# Altium PCB IsolatorBoard.PcbDoc
Units mm, origin at the board's own origin, x right, y up, seen from the top; angles counter-clockwise.
Board outline 164.08 x 101.09 mm, 2 copper layers (Top Layer, Bottom Layer); 17 components, 72 nets, 214 pads, 14 vias.
Unrouted connection lines stored in the file: 1.
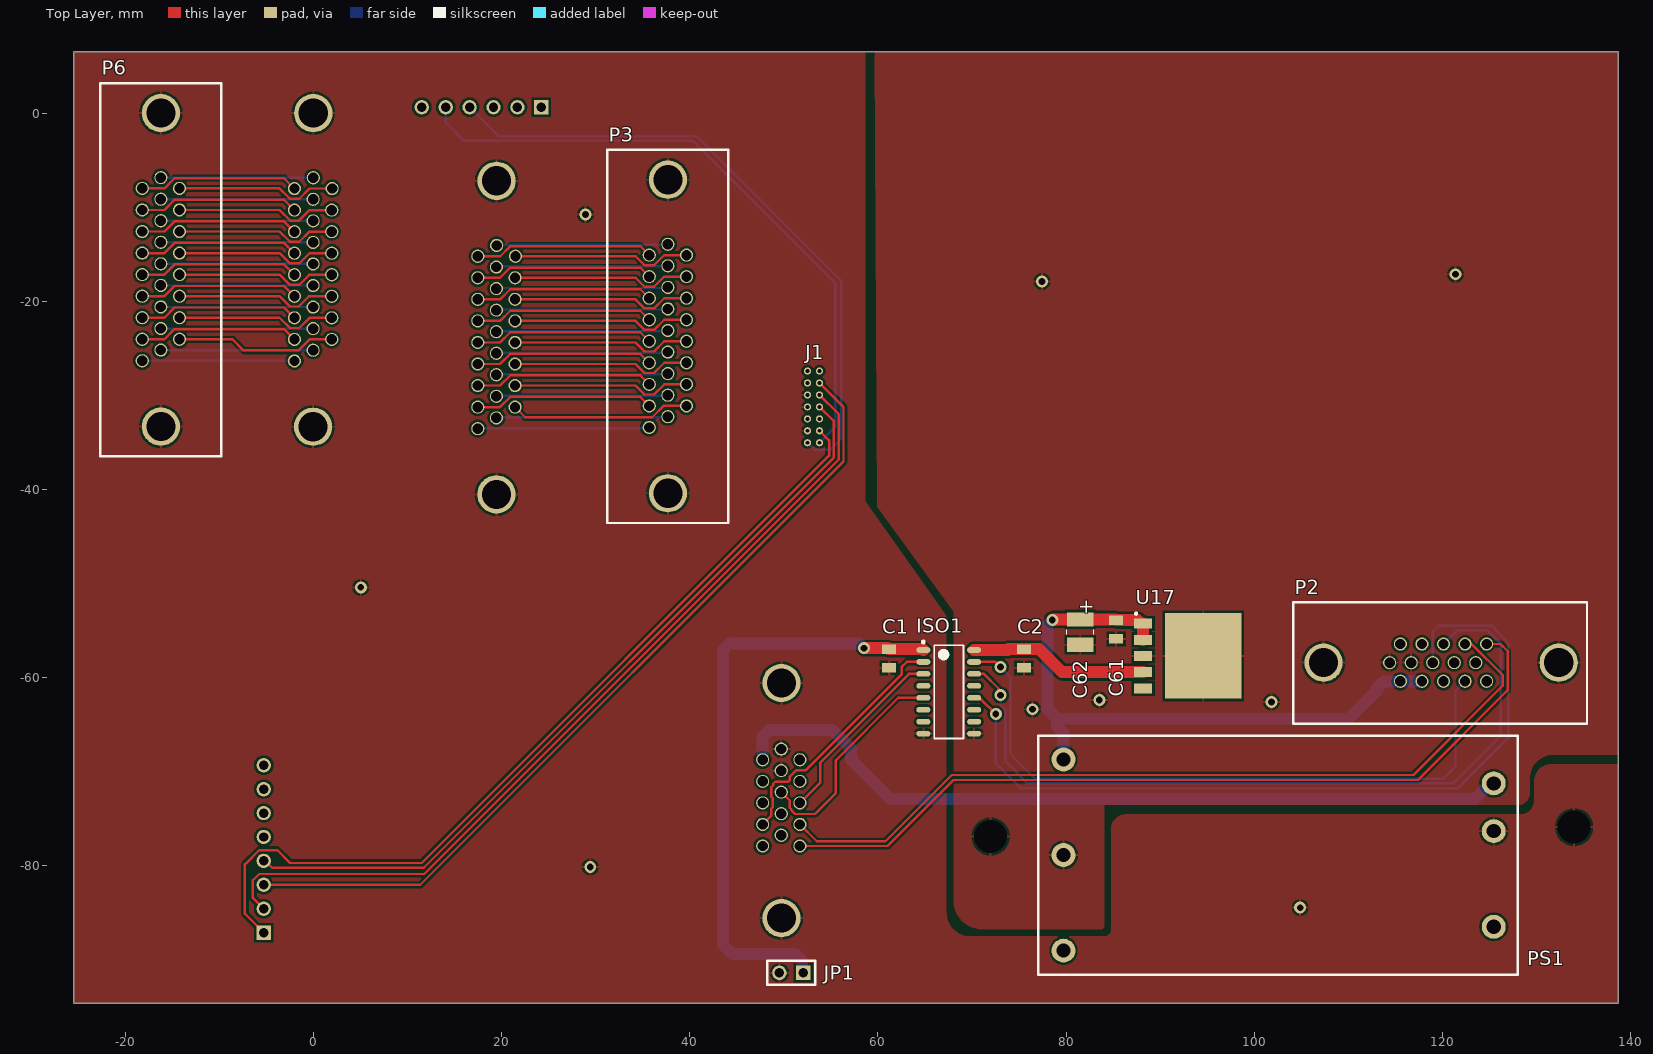
[diagram p0: Top Layer view]
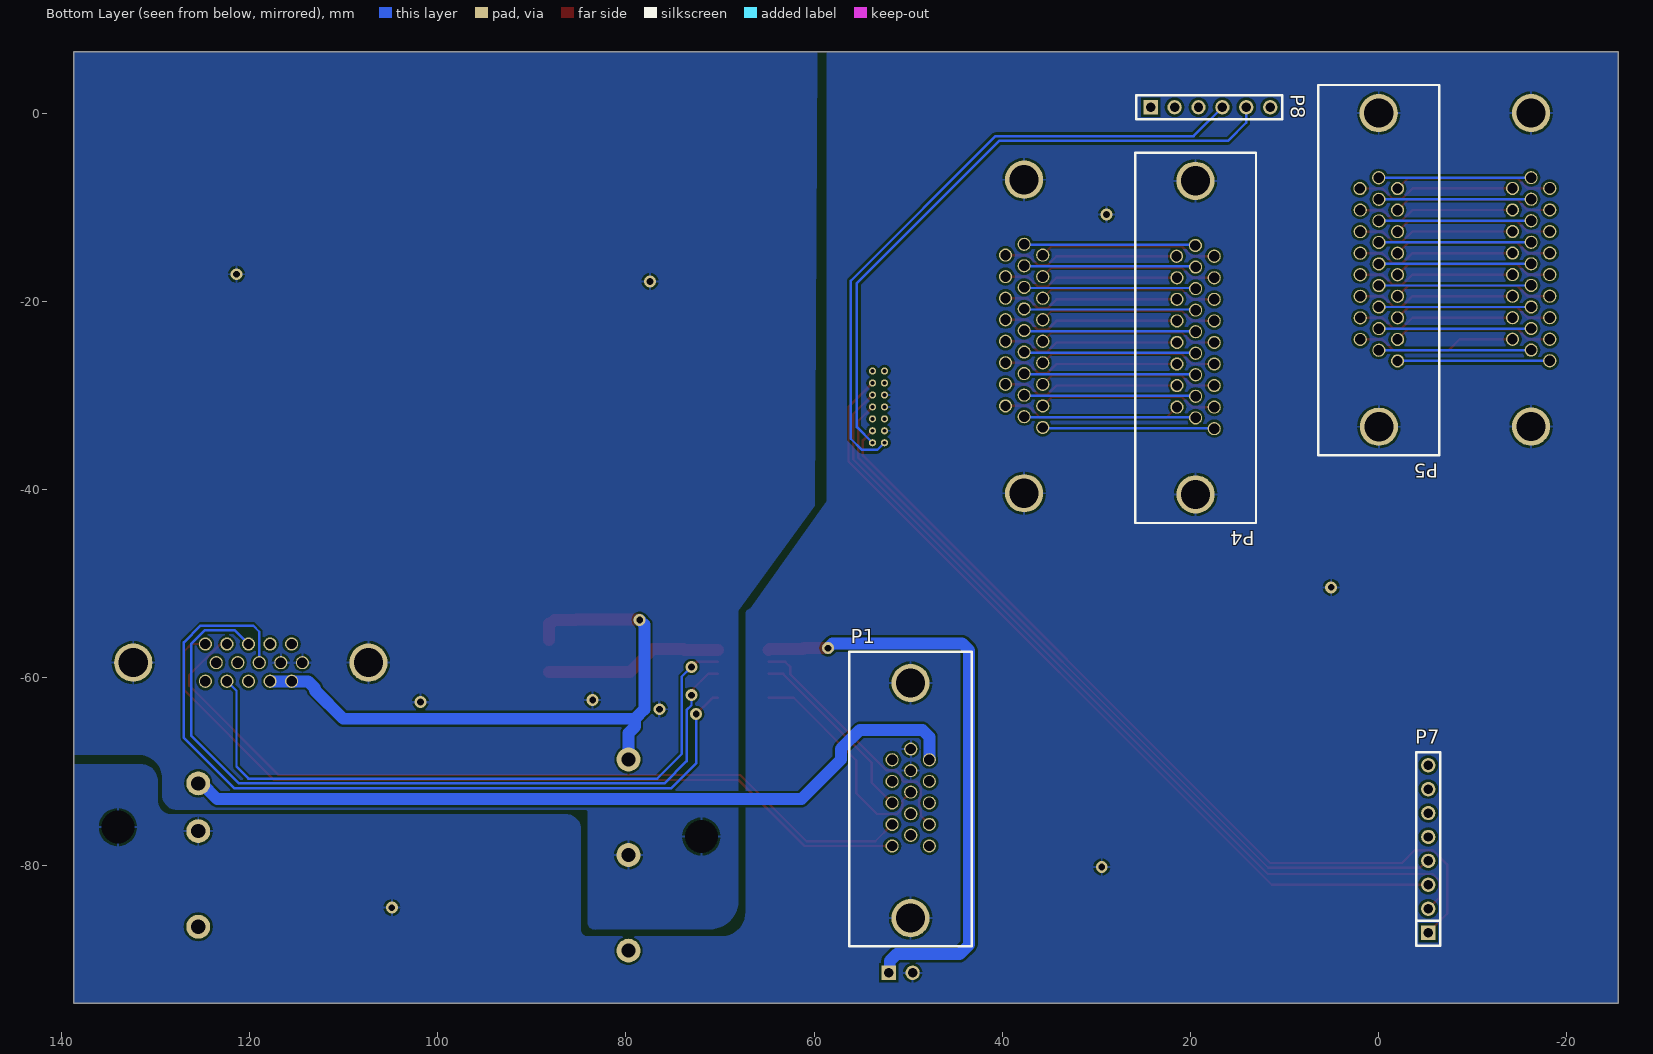
[diagram p1: Bottom Layer view, seen from below]
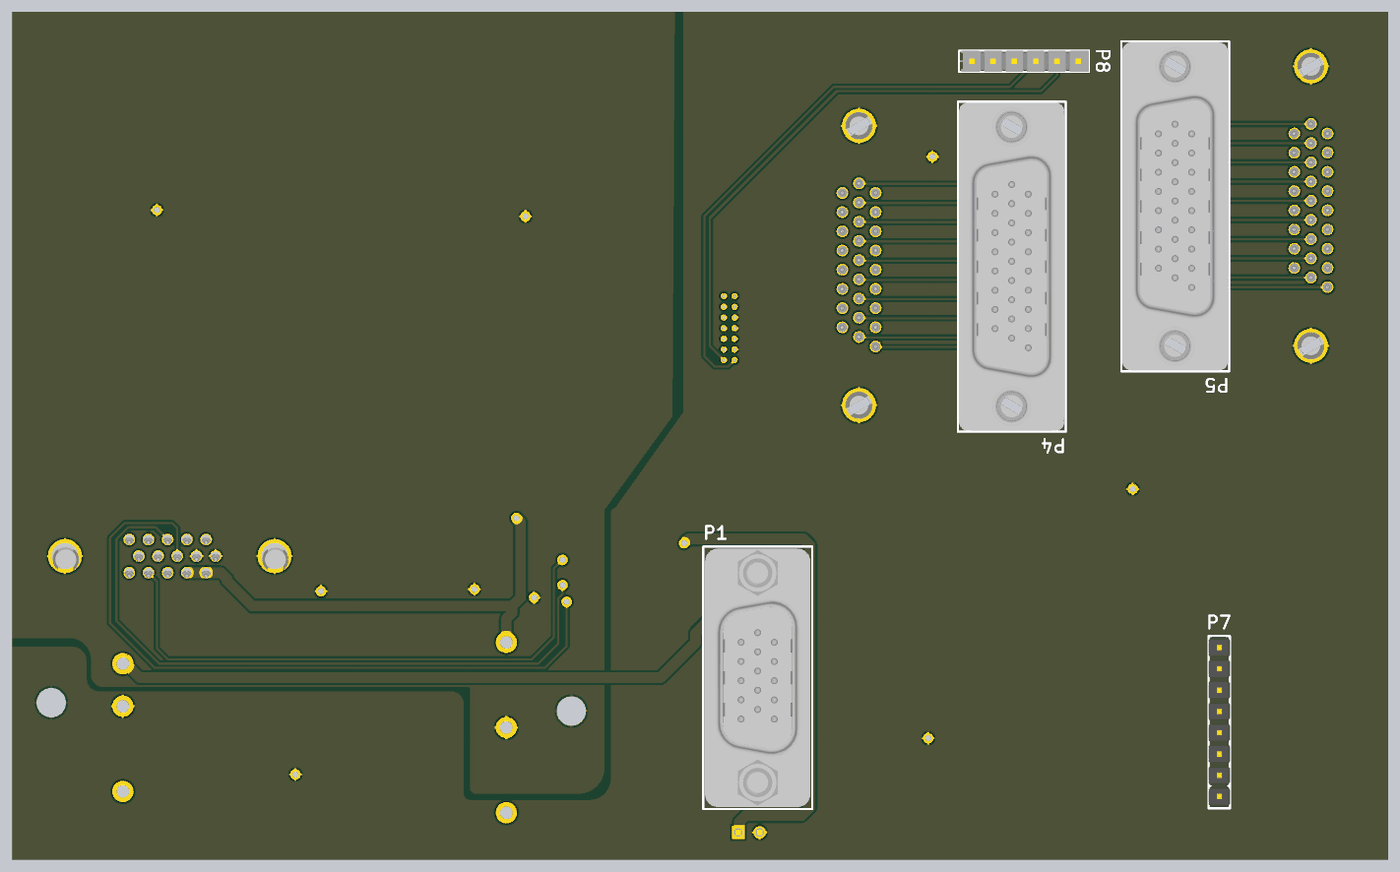
[diagram p2: 3D render of the assembled board from below, using the file's embedded part models]

## Layer stack, top to bottom
Top Solder: solder mask 0.0102, Solder Resist, Dk 3.5
Top Layer: signal copper 0.0356
Dielectric 1: dielectric 0.32, FR-4, Dk 4.8
Bottom Layer: signal copper 0.0356
Bottom Solder: solder mask 0.0102, Solder Resist, Dk 3.5

## Board outline
138.65,-94.591 138.65,6.501 -25.434,6.501 -25.434,-94.591

## Design rules (kind name [scope] priority, off if disabled: settings)
Clearance [All] p1: gap=0.254 ignorepadtopadclearanceinfootprint=FALSE except(0: Arc-Hole Track-Hole SMDPad-Hole THPad-Hole Via-Hole Fill-Hole Poly-Hole Region-Hole Text-Hole)
HoleSize [All] p1: absolutevalues=TRUE maxlimit=5.08 minlimit=0.025 maxpercent=80.000 minpercent=20.000
PolygonConnect [All] p1: connectstyle=Relief reliefconductorwidth=0.254 reliefentries=4 polygonreliefangle="90 Angle" airgapwidth=0.254
RoutingVias [All] p1: holewidth=0.711 width=1.27 viastyle="Through Hole" minholewidth=0.711 minwidth=1.27 maxholewidth=0.711 maxwidth=1.27
SolderMaskExpansion [All] p1: expansion=0.102 istentingtop=FALSE
Width [All] p1: maxlimit=1.27 minlimit=0.254 preferedwidth=0.254 minimp=50.000000 maximp=50.000000 favimp=50.000000
29 further rules are at their usual default settings.

## Components (designator, comment, footprint, x,y, rotation, side; value= is the part's Value field where it differs from the comment)
C1 "CAP 1uF 50V X5R SMT" "CAP 0805 CGA4" 61.18,-58.955 r90 top value=1uF
C2 "CAP 1uF 50V X5R SMT" "CAP 0805 CGA4" 75.505,-58.955 r90 top value=1uF
C61 "CAP .33uF SMT" "CAP 0805 CGA4" 85.31,-55.875 r90 top value=.33uF
C62 "TANT" "CAP TANT 1210" 81.5,-55.145 r270 top value=22uF
ISO1 "ISO" SOIC127ISO 67.53,-61.495 r0 top
J1 "ST-LINK V3 MINI" "Header .05\" Pitch 14Pos" 52.519,-27.408 r0 top
JP1 "DESCRIPTION" "HEADER 0.1\" 2 PIN MALE" 52.07,-91.355 r180 top
P1 "ECU IN" "DSUB HD 15P M Straight Board Locks" 49.75,-73.05 r270 bottom locked
P2 "ECU OUT" "DSUB HD 15P F Straight Board Locks" 119.85,-58.395 r180 top
P3 "SYSTEM" "DSUB HD 26P F Straight Board Locks" 37.68,-23.735 r90 top locked
P4 "SYSTEM" "DSUB HD 26P M Plug" 17.48,-33.53 r270 bottom locked
P5 "DESCRIPTION" "DSUB HD 26P M Plug" -2,-26.335 r270 bottom locked
P6 "MODULE" "DSUB HD 26P F Straight Board Locks" -16.196,-16.651 r90 top locked
P7 "ST-LINK" "HEADER 0.1\" 8 PIN MALE" -5.27,-87.08 r90 bottom locked
P8 "ENG" "HEADER 0.1\" 6 PIN MALE" 24.23,0.62 r180 bottom locked
PS1 "12 V" SKM30 125.442,-71.223 r0 top
U17 "3.3V" "HRP5 TO172P1054X2005-6N" 92.93,-57.685 r270 top

## Footprints (in the part's own frame and the unit in brackets; to place one, negate y for a bottom-side part, rotate by r counter-clockwise, add the part's x,y. Pads: shape width x height; smd on the part's side, far side on the other; paste and mask are expansions set on the pad)
"CAP 0805 CGA4" [mm] "Capacitor SMT 0805 CGA4 1.25mm height"
  rect 1x1.5 smd: 1(0,0) 2(2,0)
  body extent -0.25,-0.63 2.25,0.63, height 1.25
"CAP TANT 1210" [mm]
  rect 1.5x2.8 smd: 1(-1.35,0) 2(1.35,0)
  silkscreen extent -0.25,-1.45 0.25,1.45
"DSUB HD 15P F Straight Board Locks" [mm]
  round 1.4 hole 1.1: 1(4.33,1.98) 2(2.04,1.98) 3(-0.25,1.98) 4(-2.54,1.98) 5(-4.83,1.98) 6(5.475,0) 7(3.185,0) 8(0.895,0) 9(-1.395,0) 10(-3.685,0) 11(4.33,-1.98) 12(2.04,-1.98) 13(-0.25,-1.98) 14(-2.54,-1.98) 15(-4.83,-1.98)
  round 4.064 hole 3.099: 16(-12.495,0) 17(12.495,0)
  silkscreen extent -15.5,-6.4 15.7,6.5, body extent -15.3,-5.87 15.51,6.68, height 3.4
"DSUB HD 15P M Straight Board Locks" [mm]
  round 1.4 hole 1.1: 1(-4.33,2) 2(-2.04,2) 3(0.25,2) 4(2.54,2) 5(4.83,2) 6(-5.475,0.02) 7(-3.185,0.02) 8(-0.895,0.02) 9(1.395,0.02) 10(3.685,0.02) 11(-4.33,-1.96) 12(-2.04,-1.96) 13(0.25,-1.96) 14(2.54,-1.96) 15(4.83,-1.96)
  round 4.064 hole 3.099: 16(-12.495,0) 17(12.495,0)
  silkscreen extent -15.8,-6.5 15.5,6.5, body extent -15.55,-6.28 15.27,6.27, height 12.05
"DSUB HD 26P F Straight Board Locks" [mm]
  round 1.4 hole 1.1: 1(8.65,1.98) 2(6.36,1.98) 3(4.07,1.98) 4(1.78,1.98) 5(-0.51,1.98) 6(-2.8,1.98) 7(-5.09,1.98) 8(-7.38,1.98) 9(-9.67,1.98) 10(9.795,0) 11(7.505,0) 12(5.215,0) 13(2.925,0) 14(0.635,0) 15(-1.655,0) 16(-3.945,0) 17(-6.235,0) 18(-8.525,0) 19(8.65,-1.98) 20(6.36,-1.98) 21(4.07,-1.98) 22(1.78,-1.98) 23(-0.51,-1.98) 24(-2.8,-1.98) 25(-5.09,-1.98) 26(-7.38,-1.98)
  round 4.064 hole 3.099: 27(-16.66,0) 28(16.66,0)
  silkscreen extent -19.82,-6.43 19.82,6.43, body extent -19.56,-6.28 19.54,6.27, height 11.91
"DSUB HD 26P M Plug" [mm]
  round 1.4 hole 1.1: 1(-18.32,0) 2(-16.03,0) 3(-13.74,0) 4(-11.45,0) 5(-9.16,0) 6(-6.87,0) 7(-4.58,0) 8(-2.29,0) 9(0,0) 10(-19.465,-2) 11(-17.175,-1.98) 12(-14.885,-1.98) 13(-12.595,-1.98) 14(-10.305,-1.98) 15(-8.015,-1.98) 16(-5.725,-1.98) 17(-3.435,-1.98) 18(-1.145,-1.98) 19(-18.32,-4) 20(-16.03,-3.96) 21(-13.74,-3.96) 22(-11.45,-3.96) 23(-9.16,-3.96) 24(-6.87,-3.96) 25(-4.58,-3.96) 26(-2.29,-3.96)
  round 4.064 hole 3.099: 27(-26.335,-2) 28(6.99,-1.98)
  silkscreen extent -29.33,-8.41 10.02,4.45, body extent -29.2,-8.28 9.9,4.27, height 12.35
"HEADER 0.1\" 2 PIN MALE" [mil] "2 pin header (jumper)"
  rect 60x60 hole 39.37: 1(0,0)
  round 60 hole 39.37: 2(100,0)
  silkscreen extent -50,-50 150,50, body extent -55,-50 150,50, height 330
"HEADER 0.1\" 6 PIN MALE" [mil] "6 pin header"
  rect 60x60 hole 39.37: 1(0,0)
  round 60 hole 39.37: 2(100,0) 3(200,0) 4(300,0) 5(400,0) 6(500,0)
  silkscreen extent -60,-50 550,50, body extent -55,-50 550,50, height 330
"HEADER 0.1\" 8 PIN MALE" [mil] "6 pin header"
  rect 60x60 hole 39.37: 1(0,0)
  round 60 hole 39.37: 2(100,0) 3(200,0) 4(300,0) 5(400,0) 6(500,0) 7(600,0) 8(700,0)
  silkscreen extent -55,-50 754,50, body extent -50,-50 750,50, height 374
"Header .05\" Pitch 14Pos" [mil]
  round 30 hole 16: 1(0,0) 2(50,0) 3(0,-50) 4(50,-50) 5(0,-100) 6(50,-100) 7(0,-150) 8(50,-150) 9(0,-200) 10(50,-200) 11(0,-250) 12(50,-250) 13(0,-300) 14(50,-300)
"HRP5 TO172P1054X2005-6N" [mm] "ROHM HRP5"
  rect 1.06x1.92 smd: 1(-3.44,-4.74) 2(-1.72,-4.74) 3(0,-4.74) 4(1.72,-4.74) 5(3.44,-4.74)
  rect 9.09x8.12 smd: 6(0,1.64)
  silkscreen extent -4.6,-5.6 -4.4,-5.4, body extent -4.7,-5.12 4.7,5.42, height 1.93
SKM30 [mm] "Board Mount Power Supply"
  round 2.54 hole 1.5: 1(0,0) 2(0,-5.08) 3(0,-15.24) 4(-45.72,2.54) 5(-45.72,-7.62) 6(-45.72,-17.78)
  silkscreen extent -48.42,-20.32 2.54,5.08, body extent -48.26,-20.32 2.54,5.08, height 11.2
SOIC127ISO [mm] "SOIC, 16-Leads, Body 9.90x3.90mm, Pitch 1.27mm, IPC Medium Density"
  oval 1.5x0.6 smd: 1(-2.7,4.445) 2(-2.7,3.175) 3(-2.7,1.905) 4(-2.7,0.635) 5(-2.7,-0.635) 6(-2.7,-1.905) 7(-2.7,-3.175) 8(-2.7,-4.445) 9(2.7,-4.445) 10(2.7,-3.175) 11(2.7,-1.905) 12(2.7,-0.635) 13(2.7,0.635) 14(2.7,1.905) 15(2.7,3.175) 16(2.7,4.445)
  silkscreen extent -2.82,-4.95 1.55,5.42, body extent -1.95,-4.95 1.95,4.95, height 1.25

## Part data
C1 C2: "Capacitor 1uF X5R 50V 10% 0805 SMT", MFG=AVX, P/N=08055D105KAT2A, PackageDescription=0805, PFT PN=10062
C61: "Capacitor .33uF 50V 10% X7R 0805 SMT", MFG=TDK, P/N=CGA4J2X7R1H334K125AA
C62: library part "CAP TANT 22uF SMT", "Capacitor Tantalum 22uF 20V 0.6Ohm SMT", MFG=AVX, P/N=TPSB226K020T0600, PackageDescription=1210, PFT PN=10018
ISO1: library part "IC DIGITAL ISOLATOR 6CH 3IN/3IN", "6Ch Digital Isolator 3inputs side 1 / 3 inputs side 2", Supplier Part Number 1=634-SI8660BA-B-IS1, MFG="Silicon Labs", P/N=SI8663BD-B-ISR, Supplier 1=Mouser
J1: library part "CON HEADER 14POS 0.05\"", "HD D-Sub Connector 26 pin female vertical", MFG=Amphenol, P/N=10090929-S264VLF, Type="HEADER 14POS"
JP1: library part "JUMPER 2 POLE MALE HEADER", "Jumper 2 pole male header", MFG=SAMTEC, P/N=TSW-102-07-F-S, PFT PN=10028
P1: library part "CON HD DSUB 15P-M", "HD D-Sub Connector 15 pin male vertical", MFG=Amphenol, P/N=10090928-P154XLF, Type="HD DSUB-15 M"
P2: library part "CON HD DSUB 15P-F", "HD D-Sub Connector 15 pin female vertical", MFG=Amphenol, P/N=10090929-S156VLF, PFT PN=10033, Type="HD DSUB-15 F"
P3 P4 P5 P6: library part "CON HD DSUB 26P-F", "HD D-Sub Connector 26 pin female vertical", MFG=Amphenol, P/N=10090929-S264VLF, PFT PN=10034, Type="HD DSUB-26 F"
P7: library part "CON HEADER FEMALE 8 POS 0.1\"", "Header 8 position female 0.1\"", MFG=Samtec, P/N=SSW-108-01-T-S, PFT PN=10032, Type="Header Female"
P8: library part "CON HEADER FEMALE 6 POS 0.1\" SMT", "Header 6 position female 0.1\"", MFG=Samtec, P/N=SSW-106-22-F-S-VS-K, PFT PN=10035, Type="Header Female"
PS1: library part "POWER SUPPLY ISO 12V 2.5A 9~18Vin", "Isolated power supply", MFG=Meanwell, P/N=SKM30A-12
U17: library part "VREG 3.3V 2A 25 IN MAX SMD", "LDO Regulator Pos 3.3V 2A HRP SMD", Package="TO-263-6 Rohm", MFG=Rohm, P/N=BA33DD0WHFP-TR, PFT PN=10057

## Free pads (board coordinates)
  rrect50% 1.651x2.413 hole 3.505: 2(71.98,-76.88) 3(133.98,-75.88)

## Via types
v1: diameter 1.27, hole 0.711, Top Layer to Bottom Layer, 14 vias

## Nets (pads, with @x,y where several pads share a name; then routed paths per layer and width w, separated by ;. In a path a pad name is that pad's centre, name@x,y a point inside that pad or via, vN(x,y) a via of type N, cw(c..) or ccw(c..) an arc to the next point about the centre after c; other vN are vias at no path point)
12V_IN: P1.1 P1.2 PS1.1 | length 84.9
  Bottom Layer w1.27: P1.1 47.75,-66.276 48.494,-65.532 55.118,-65.532 57.15,-67.564 57.15,-68.693 61.355,-72.898 123.423,-72.898 125.098,-71.223 PS1.1
12V_OUT: C61.2 C62.1 P2.1 P2.2 PS1.4 U17.1 U17.2 | length 67.9
  Top Layer w1.27: v1(78.53,-53.855) 78.59,-53.795 C62.1 85.23,-53.795 C61.2 87.6,-53.875 87.97,-54.245 U17.1 U17.2
  Bottom Layer w1.27: v1(78.53,-53.855) 78.03,-54.355 78.03,-63.355 79.03,-64.355 ; PS1.4 79.722,-65.889 79.03,-65.197 79.03,-64.355 ; P2.2 P2.1 113.774,-60.375 113.03,-61.119 113.03,-61.355 110.03,-64.355 79.03,-64.355
CAN_H: P1.15 P2.15 | length 88.8
  Top Layer w0.254: P1.15 61.033,-77.88 68.047,-70.866 117.373,-70.866 126.924,-61.316 126.924,-57.175 126.163,-56.415 P2.15
CAN_L: P1.14 P2.14 | length 88.8
  Top Layer w0.254: P1.14 53.492,-77.372 60.804,-77.372 67.842,-70.334 80.406,-70.334 80.407,-70.333 116.897,-70.333 126.39,-60.839 126.39,-59.722 123.139,-56.47 122.445,-56.47 P2.14
GND_IN: C1.1 ISO1.8 J1.5 J1.7 J1.11 JP1.2 P1.6 P1.7 P1.16 P1.17 P3.27 P3.28 P4.27 P4.28 P5.27 P5.28 P6.27 P6.28 pad.3 PS1.2
  other v1: 104.868,-84.431 29.43,-80.113 5.046,-50.395 28.922,-10.771
GND_OUT: C2.1 C61.1 C62.2 ISO1.9 P2.6 P2.7 P2.16 P2.17 pad.2 PS1.5 U17.3 U17.6
  other v1: 76.42,-63.349 101.82,-62.587 83.53,-62.355 77.436,-17.883 121.378,-17.121
NetC1_2: C1.2 ISO1.1 JP1.1 | length 63.6
  Top Layer w1.27: v1(58.53,-56.855) 61.08,-56.855 C1.2 64.735,-56.955 ISO1.1
  Bottom Layer w1.27: JP1.1 51.961,-91.246 51.961,-90.099 51.217,-89.355 44.53,-89.355 43.53,-88.355 43.53,-57.099 44.274,-56.355 58.03,-56.355 v1(58.53,-56.855)
NetC2_2: C2.2 ISO1.16 U17.4 | length 19
  Top Layer w1.27: ISO1.16 73.785,-57.05 73.88,-56.955 77.13,-56.955 79.58,-59.405 U17.4
NetISO1_2: ISO1.2 P1.4 | length 26.9
  Top Layer w0.254: P1.4 48.649,-74.691 48.649,-73.93 48.831,-73.748 48.831,-72.785 48.649,-72.603 48.649,-71.64 48.874,-71.415 48.874,-71.268 49.098,-71.044 50.48,-71.044 50.629,-70.895 50.629,-70.562 50.648,-70.544 50.648,-70.51 51.308,-69.85 52.317,-69.85 62.522,-59.645 62.522,-58.863 63.065,-58.32 ISO1.2
NetISO1_3: ISO1.3 P1.13 | length 20
  Top Layer w0.254: P1.13 53.881,-71.129 53.881,-69.004 63.295,-59.59 ISO1.3
NetISO1_5: ISO1.5 P1.8 | length 23.7
  Top Layer w0.254: P1.8 50.629,-73.054 50.629,-73.815 50.811,-73.997 50.811,-74.103 51.181,-74.473 53.315,-74.473 55.53,-72.257 55.53,-68.76 62.16,-62.13 ISO1.5
NetISO1_12: ISO1.12 P2.8 | length 88.5
  Top Layer w0.254: ISO1.12 70.774,-62.13 70.939,-62.295 70.97,-62.295 v1(72.53,-63.855)
  Bottom Layer w0.254: v1(72.53,-63.855) 72.53,-69.111 75.15,-71.731 121.632,-71.731 126.966,-66.397 126.966,-56.237 125.188,-54.459 119.6,-54.459 118.955,-55.104 P2.8
NetISO1_14: ISO1.14 P2.13 | length 84
  Top Layer w0.254: ISO1.14 71.265,-59.59 72.836,-61.161 72.836,-61.661 v1(73.03,-61.855)
  Bottom Layer w0.254: v1(73.03,-61.855) 73.03,-62.918 73.546,-63.434 73.546,-68.857 75.912,-71.223 121.124,-71.223 126.204,-66.143 126.204,-56.41 124.761,-54.967 121.548,-54.967 P2.13
NetISO1_15: ISO1.15 P2.4 | length 71.1
  Top Layer w0.254: ISO1.15 72.495,-58.32 v1(73.03,-58.855)
  Bottom Layer w0.254: v1(73.03,-58.855) 74.054,-59.879 74.054,-68.095 76.674,-70.715 120.108,-70.715 121.378,-69.445 121.378,-61.387 P2.4
NetP3_1: P3.1 P4.1 | length 19.1
  Top Layer w0.254: P4.1 19.864,-15.21 20.945,-14.129 34.744,-14.129 P3.1
NetP3_2: P3.2 P4.2 | length 19.1
  Top Layer w0.254: P4.2 19.844,-17.5 20.925,-16.419 34.744,-16.419 P3.2
NetP3_3: P3.3 P4.3 | length 19.1
  Top Layer w0.254: P4.3 19.844,-19.79 20.925,-18.709 34.744,-18.709 P3.3
NetP3_4: P3.4 P4.4 | length 19.1
  Top Layer w0.254: P4.4 19.844,-22.08 20.925,-20.999 34.744,-20.999 P3.4
NetP3_5: P3.5 P4.5 | length 19.1
  Top Layer w0.254: P4.5 19.844,-24.37 20.925,-23.289 34.744,-23.289 P3.5
NetP3_6: P3.6 P4.6 | length 19.1
  Top Layer w0.254: P4.6 19.844,-26.66 20.925,-25.579 34.744,-25.579 P3.6
NetP3_7: P3.7 P4.7 | length 19.1
  Top Layer w0.254: P4.7 19.844,-28.95 20.925,-27.869 34.744,-27.869 P3.7
NetP3_8: P3.8 P4.8 | length 19.1
  Top Layer w0.254: P4.8 19.844,-31.24 20.925,-30.159 34.744,-30.159 P3.8
NetP3_9: P3.9 P4.9 | length 18.3
  Bottom Layer w0.254: P4.9 17.542,-33.467 35.638,-33.467 P3.9
NetP3_10: P3.10 P4.10 | length 18.3
  Bottom Layer w0.254: P4.10 19.542,-14.002 37.618,-14.002 P3.10
NetP3_11: P3.11 P4.11 | length 18.3
  Bottom Layer w0.254: P4.11 19.522,-16.292 37.618,-16.292 P3.11
NetP3_12: P3.12 P4.12 | length 18.3
  Bottom Layer w0.254: P4.12 19.522,-18.583 37.618,-18.583 P3.12
NetP3_13: P3.13 P4.13 | length 18.3
  Bottom Layer w0.254: P4.13 19.522,-20.872 37.618,-20.872 P3.13
NetP3_14: P3.14 P4.14 | length 18.3
  Bottom Layer w0.254: P4.14 19.522,-23.162 37.618,-23.162 P3.14
NetP3_15: P3.15 P4.15 | length 18.3
  Bottom Layer w0.254: P4.15 19.522,-25.452 37.618,-25.452 P3.15
NetP3_16: P3.16 P4.16 | length 18.3
  Bottom Layer w0.254: P4.16 19.522,-27.742 37.618,-27.742 P3.16
NetP3_17: P3.17 P4.17 | length 18.3
  Bottom Layer w0.254: P4.17 19.522,-30.033 37.618,-30.033 P3.17
NetP3_18: P3.18 P4.18 | length 18.3
  Bottom Layer w0.254: P4.18 19.522,-32.322 37.618,-32.322 P3.18
NetP3_19: P3.19 P4.19 | length 19
  Top Layer w0.254: P4.19 34.253,-15.21 35.209,-16.166 36.215,-16.166 37.296,-15.085 P3.19
NetP3_20: P3.20 P4.20 | length 19.1
  Top Layer w0.254: P4.20 34.253,-17.5 35.209,-18.456 36.215,-18.456 37.296,-17.375 P3.20
NetP3_21: P3.21 P4.21 | length 19.1
  Top Layer w0.254: P4.21 34.253,-19.79 35.209,-20.746 36.215,-20.746 37.296,-19.665 P3.21
NetP3_22: P3.22 P4.22 | length 19.1
  Top Layer w0.254: P4.22 34.253,-22.08 35.209,-23.036 36.215,-23.036 37.296,-21.955 P3.22
NetP3_23: P3.23 P4.23 | length 19.1
  Top Layer w0.254: P4.23 34.253,-24.37 35.209,-25.326 36.215,-25.326 37.296,-24.245 P3.23
NetP3_24: P3.24 P4.24 | length 19.1
  Top Layer w0.254: P4.24 34.253,-26.66 35.209,-27.616 36.215,-27.616 37.296,-26.535 P3.24
NetP3_25: P3.25 P4.25 | length 19.1
  Top Layer w0.254: P4.25 34.253,-28.95 35.209,-29.906 36.215,-29.906 37.296,-28.825 P3.25
NetP3_26: P3.26 P4.26 | length 19.2
  Top Layer w0.254: P4.26 22.524,-32.324 36.02,-32.324 37.229,-31.115 P3.26
NetP5_1: P5.1 P6.1 | length 17.1
  Top Layer w0.254: P6.1 -15.812,-8.001 -14.731,-6.92 -3.095,-6.92 P5.1
NetP5_2: P5.2 P6.2 | length 17.1
  Top Layer w0.254: P6.2 -15.812,-10.291 -14.731,-9.21 -3.095,-9.21 P5.2
NetP5_3: P5.3 P6.3 | length 17.1
  Top Layer w0.254: P6.3 -15.812,-12.581 -14.731,-11.5 -3.095,-11.5 P5.3
NetP5_4: P5.4 P6.4 | length 17.1
  Top Layer w0.254: P6.4 -15.812,-14.871 -14.731,-13.79 -3.095,-13.79 P5.4
NetP5_5: P5.5 P6.5 | length 17.1
  Top Layer w0.254: P6.5 -15.812,-17.161 -14.731,-16.08 -3.095,-16.08 P5.5
NetP5_6: P5.6 P6.6 | length 17.1
  Top Layer w0.254: P6.6 -15.812,-19.451 -14.731,-18.37 -3.095,-18.37 P5.6
NetP5_7: P5.7 P6.7 | length 17.1
  Top Layer w0.254: P6.7 -15.812,-21.741 -14.731,-20.66 -3.095,-20.66 P5.7
NetP5_8: P5.8 P6.8 | length 17.1
  Top Layer w0.254: P6.8 -15.812,-24.031 -14.731,-22.95 -3.095,-22.95 P5.8
NetP5_9: P5.9 P6.9 | length 16.2
  Bottom Layer w0.254: P6.9 -18.169,-26.328 -2.007,-26.328 P5.9
NetP5_10: P5.10 P6.10 | length 16.2
  Bottom Layer w0.254: P6.10 -16.189,-6.863 -0.007,-6.863 P5.10
NetP5_11: P5.11 P6.11 | length 16.2
  Bottom Layer w0.254: P6.11 -16.189,-9.153 -0.027,-9.153 P5.11
NetP5_12: P5.12 P6.12 | length 16.2
  Bottom Layer w0.254: P6.12 -16.189,-11.443 -0.027,-11.443 P5.12
NetP5_13: P5.13 P6.13 | length 16.2
  Bottom Layer w0.254: P6.13 -16.189,-13.733 -0.027,-13.733 P5.13
NetP5_14: P5.14 P6.14 | length 16.2
  Bottom Layer w0.254: P6.14 -16.189,-16.023 -0.027,-16.023 P5.14
NetP5_15: P5.15 P6.15 | length 16.2
  Bottom Layer w0.254: P6.15 -16.189,-18.313 -0.027,-18.313 P5.15
NetP5_16: P5.16 P6.16 | length 16.2
  Bottom Layer w0.254: P6.16 -16.189,-20.603 -0.027,-20.603 P5.16
NetP5_17: P5.17 P6.17 | length 16.2
  Bottom Layer w0.254: P6.17 -16.189,-22.893 -0.027,-22.893 P5.17
NetP5_18: P5.18 P6.18 | length 16.2
  Bottom Layer w0.254: P6.18 -16.189,-25.183 -0.027,-25.183 P5.18
NetP5_19: P5.19 P6.19 | length 17.1
  Top Layer w0.254: P6.19 -3.585,-8.001 -2.491,-9.096 -1.485,-9.096 -0.404,-8.015 P5.19
NetP5_20: P5.20 P6.20 | length 17.1
  Top Layer w0.254: P6.20 -3.585,-10.291 -2.456,-11.421 -1.52,-11.421 -0.404,-10.305 P5.20
NetP5_21: P5.21 P6.21 | length 17.1
  Top Layer w0.254: P6.21 -3.585,-12.581 -2.491,-13.676 -1.485,-13.676 -0.404,-12.595 P5.21
NetP5_22: P5.22 P6.22 | length 17.1
  Top Layer w0.254: P6.22 -3.585,-14.871 -2.491,-15.966 -1.485,-15.966 -0.404,-14.885 P5.22
NetP5_23: P5.23 P6.23 | length 17.1
  Top Layer w0.254: P6.23 -3.585,-17.161 -2.491,-18.256 -1.493,-18.256 -0.412,-17.175 P5.23
NetP5_24: P5.24 P6.24 | length 17.1
  Top Layer w0.254: P6.24 -3.585,-19.451 -2.491,-20.546 -1.552,-20.546 -0.471,-19.465 P5.24
NetP5_25: P5.25 P6.25 | length 17.1
  Top Layer w0.254: P6.25 -3.585,-21.741 -2.491,-22.836 -1.485,-22.836 -0.404,-21.755 P5.25
NetP5_26: P5.26 P6.26 | length 17.1
  Top Layer w0.254: P6.26 -8.581,-24.031 -7.399,-25.213 -1.572,-25.213 -0.404,-24.045 P5.26
NRST: J1.12 P7.1 | length 92.3
  Top Layer w0.254: P7.1 -7.264,-85.086 -7.264,-79.838 -5.743,-78.317 -3.835,-78.317 -2.473,-79.68 11.524,-79.68 54.813,-36.391 54.813,-34.783 J1.12
SWCLK: J1.6 P7.2 | length 92
  Top Layer w0.254: P7.2 -6.413,-83.397 -6.413,-81.527 -5.743,-80.857 11.784,-80.857 55.829,-36.812 55.829,-31.989 J1.6
SWDIO: J1.4 P7.3 | length 89.6
  Top Layer w0.254: P7.3 11.359,-82 56.337,-37.022 56.337,-31.227 J1.4
SWO: J1.8 P7.4 | length 85
  Top Layer w0.254: P7.4 -5.109,-79.46 -4.381,-80.188 11.735,-80.188 55.321,-36.601 55.321,-32.751 J1.8
UART3_RX: J1.13 P8.4 | length 68.3
  Bottom Layer w0.254: P8.4 19.668,-2.438 40.716,-2.438 56.109,-17.831 56.109,-34.595 54.913,-35.79 53.281,-35.79 J1.13
UART3_TX: J1.14 P8.5 | length 67.7
  Bottom Layer w0.254: P8.5 14.07,-1.014 16.002,-2.946 40.335,-2.946 55.448,-18.059 55.448,-33.368 J1.14
pads on no net: ISO1.4 ISO1.6 ISO1.7 ISO1.10 ISO1.11 ISO1.13 J1.1 J1.2 J1.3 J1.9 J1.10 P1.3 P1.5 P1.9 P1.10 P1.11 P1.12 P2.3 P2.5 P2.9 P2.10 P2.11 P2.12 P7.5 P7.6 P7.7 P7.8 P8.1 P8.2 P8.3 P8.6 PS1.3 PS1.6 U17.5

## Polygon pours and split planes (outlines as drawn)
GND_IN on Top Layer "GND_IN_L01_P003" (solid, pour order 3): 138.65,-69.191 131.538,-69.191 ccw(c131.538,-70.969) 129.76,-70.969 129.76,-73.001 cw(c128.236,-73.001) 128.236,-74.525 86.326,-74.525 ccw(c86.326,-76.049) 84.802,-76.049 84.802,-86.717 cw(c84.04,-86.717) 84.04,-87.479 69.816,-87.479 cw(c69.816,-84.939) 67.276,-84.939 67.276,-53.395 58.64,-41.251 58.64,6.501 -25.434,6.501 -25.434,-94.591 138.65,-94.591
GND_OUT on Top Layer "GND_OUT_L01_P008" (solid, pour order 8): 59.644,6.501 138.65,6.501 138.65,-68.175 131.792,-68.175 ccw(c131.792,-70.715) 129.252,-70.715 129.252,-72.493 cw(c127.982,-72.239) 127.728,-73.509 84.04,-73.509 84.04,-86.209 cw(c83.659,-86.336) 83.786,-86.717 71.34,-86.717 cw(c71.086,-83.669) 68.038,-83.923 68.038,-52.979 59.92,-41.817
GND_IN on Bottom Layer "GND_IN_L02_P004" (solid, pour order 4): 138.65,-69.191 131.538,-69.191 ccw(c131.538,-70.969) 129.76,-70.969 129.76,-73.001 cw(c128.236,-73.001) 128.236,-74.525 86.326,-74.525 ccw(c86.326,-76.049) 84.802,-76.049 84.802,-86.717 cw(c84.04,-86.717) 84.04,-87.479 69.816,-87.479 cw(c69.816,-84.939) 67.276,-84.939 67.276,-53.189 ccw(c66.768,-53.189) 66.768,-52.681 58.64,-41.251 58.64,6.501 -25.434,6.501 -25.434,-94.591 138.65,-94.591
GND_OUT on Bottom Layer "GND_OUT_L02_P005" (solid, pour order 5): 59.644,6.501 138.65,6.501 138.65,-68.175 131.792,-68.175 ccw(c131.792,-70.715) 129.252,-70.715 129.252,-72.493 cw(c127.728,-72.493) 127.728,-74.017 84.294,-74.017 ccw(c84.294,-74.271) 84.04,-74.271 84.04,-86.209 cw(c83.278,-85.955) 83.024,-86.717 71.34,-86.717 cw(c71.086,-83.669) 68.038,-83.923 68.038,-52.906 59.92,-41.744

## Text inside footprints (layer, text, board x,y; h text height)
C62: Top Overlay "+" at 81.5,-51.595 h1.52 r270